# EAGLE board can-udp-bridge_0_2.pan (EAGLE 7.2.0)
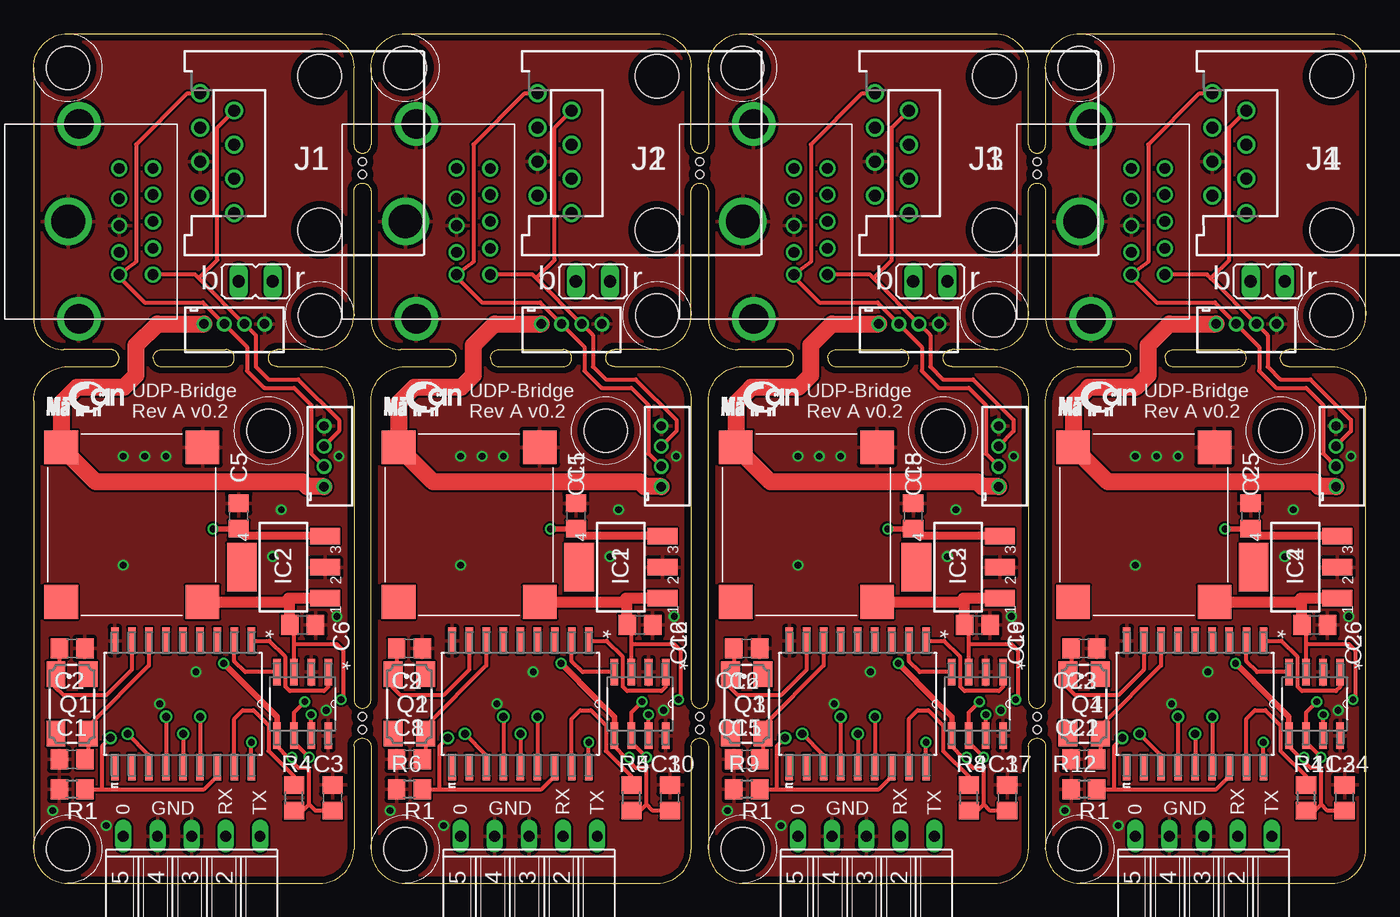
[diagram p0: board, top side]
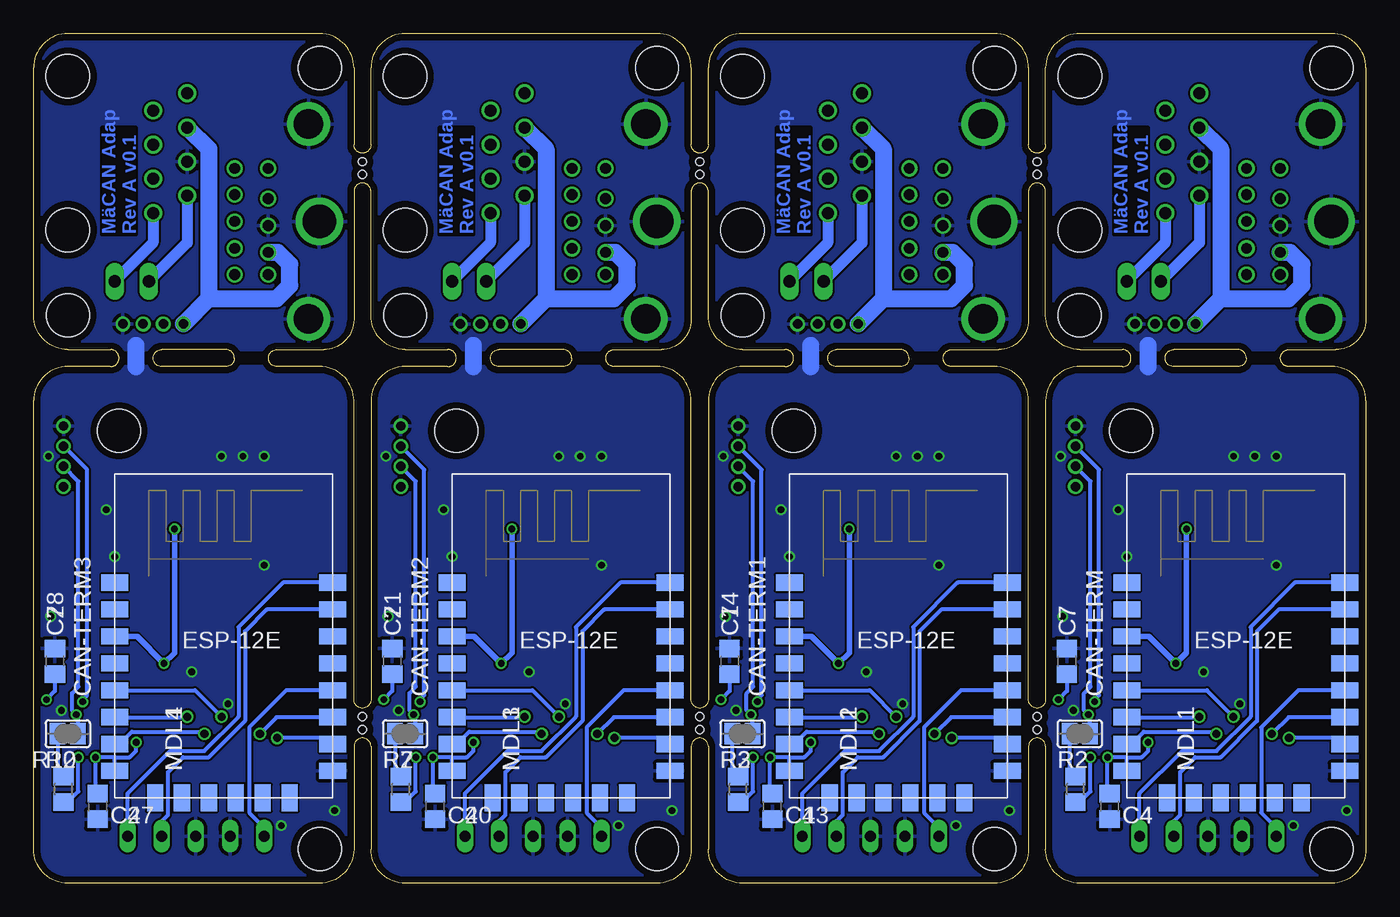
[diagram p1: board, bottom side, seen from below]

Size 99.06 x 63.18 mm. Coordinates in mm from the lower left corner, seen from the top.
Outline: 2.54,0 21.27,0 arc90 23.81,2.54 23.81,10.16 arc-90 24.45,10.79 arc-90 25.08,10.16 25.08,2.54 arc90 27.62,0 46.35,0 arc90 48.9,2.54 48.9,10.16 arc-90 49.53,10.79 arc-90 50.16,10.16 50.16,2.54 arc90 52.7,0 71.44,0 arc90 73.98,2.54 73.98,10.16 arc-90 74.61,10.79 arc-90 75.25,10.16 75.25,2.54 arc90 77.79,0 96.52,0 arc90 99.06,2.54 99.06,35.88 arc90 96.52,38.42 93.34,38.42 arc-90 92.71,39.05 arc-90 93.34,39.69 96.52,39.69 arc90 99.06,42.23 99.06,60.64 arc90 96.52,63.18 77.79,63.18 arc90 75.25,60.64 75.25,54.93 arc-90 74.61,54.29 arc-90 73.98,54.93 73.98,60.64 arc90 71.44,63.18 52.7,63.18 arc90 50.16,60.64 50.16,54.93 arc-90 49.53,54.29 arc-90 48.9,54.93 48.9,60.64 arc90 46.35,63.18 27.62,63.18 arc90 25.08,60.64 25.08,54.93 arc-90 24.45,54.29 arc-90 23.81,54.93 23.81,60.64 arc90 21.27,63.18 2.54,63.18 arc90 0,60.64 0,41.91 arc90 2.22,39.69 5.71,39.69 arc-90 6.35,39.05 arc-90 5.71,38.42 2.54,38.42 arc90 0,35.88 0,2.54 arc90 2.54,0
Outline: 23.81,42.23 23.81,51.44 arc-90 24.45,52.07 arc-90 25.08,51.44 25.08,41.91 arc90 27.3,39.69 30.8,39.69 arc-90 31.43,39.05 arc-90 30.8,38.42 27.62,38.42 arc90 25.08,35.88 25.08,13.65 arc-90 24.45,13.02 arc-90 23.81,13.65 23.81,35.88 arc90 21.27,38.42 18.1,38.42 arc-90 17.46,39.05 arc-90 18.1,39.69 21.27,39.69 arc90 23.81,42.23
Outline: 9.53,39.69 14.29,39.69 arc-90 14.92,39.05 arc-90 14.29,38.42 9.53,38.42 arc-90 8.89,39.05 arc-90 9.53,39.69
Outline: 43.18,38.42 46.35,38.42 arc-90 48.9,35.88 48.9,13.65 arc90 49.53,13.02 arc90 50.16,13.65 50.16,35.88 arc-90 52.7,38.42 55.88,38.42 arc90 56.52,39.05 arc90 55.88,39.69 52.39,39.69 arc-90 50.16,41.91 50.16,51.44 arc90 49.53,52.07 arc90 48.9,51.44 48.9,42.23 arc-90 46.35,39.69 43.18,39.69 arc90 42.55,39.05 arc90 43.18,38.42
Outline: 34.61,39.69 39.37,39.69 arc-90 40.01,39.05 arc-90 39.37,38.42 34.61,38.42 arc-90 33.97,39.05 arc-90 34.61,39.69
Outline: 68.26,38.42 71.44,38.42 arc-90 73.98,35.88 73.98,13.65 arc90 74.61,13.02 arc90 75.25,13.65 75.25,35.88 arc-90 77.79,38.42 80.96,38.42 arc90 81.6,39.05 arc90 80.96,39.69 77.47,39.69 arc-90 75.25,41.91 75.25,51.44 arc90 74.61,52.07 arc90 73.98,51.44 73.98,42.23 arc-90 71.44,39.69 68.26,39.69 arc90 67.63,39.05 arc90 68.26,38.42
Outline: 59.69,39.69 64.45,39.69 arc-90 65.09,39.05 arc-90 64.45,38.42 59.69,38.42 arc-90 59.05,39.05 arc-90 59.69,39.69
Outline: 84.77,39.69 89.53,39.69 arc-90 90.17,39.05 arc-90 89.53,38.42 84.77,38.42 arc-90 84.14,39.05 arc-90 84.77,39.69
Copper layers (1*16): Top 0.035mm / dielectric 1.6mm / Bottom 0.035mm
Design rules "Elecrow_2-layer_PCB_eagle_rule": minimum track width 6mil, minimum drill 12mil, track to track 6mil, track to pad 6mil, pad to pad 6mil, via to via 8mil, smd to smd 0mil, copper to edge 20mil, drill to drill 10mil, minimum pad ring 6mil, minimum via ring 6mil, stop-mask expansion 0mil, vias tented up to drill 100mil, thermal gap 10mil
Holes 3.2 mm at 2.54,2.54 17.46,33.66 21.27,42.23 2.54,60.64 27.62,2.54 42.55,33.66 46.35,42.23 27.62,60.64 52.7,2.54 67.63,33.66 71.44,42.23 52.7,60.64 77.79,2.54 92.71,33.66 96.52,42.23 77.79,60.64
Holes 0.6 mm at 24.45,53.66 24.45,52.7 49.53,53.66 49.53,52.7 74.61,53.66 74.61,52.7 24.45,12.38 24.45,11.43 49.53,12.38 49.53,11.43 74.61,12.38 74.61,11.43

## Footprints (pad centres in the part's own frame; a part is rotated, then mirrored left to right if it is on the bottom)
C0805 = smd 1.3 x 1.5: 1 -0.95,0; 2 0.95,0
SJ = smd 1.168 x 1.6: 1 -0.762,0; 2 0.762,0
SOT223 = smd 1.219 x 2.235: 1 -2.311,-3.099; 2 0,-3.099; 3 2.311,-3.099 | smd 3.6 x 2.2: 4 0,3.099
215877-7 = drill 0.889: 1 -4.445,6.35; 2 -3.175,8.89; 3 -1.905,6.35; 4 -0.635,8.89; 5 0.635,6.35; 6 1.905,8.89; 7 3.175,6.35; 8 4.445,8.89 | hole 3.251: -5.715,0; 5.715,0
ESP8266-ESP12E = smd 2 x 1.2: 1 0,16; 2 0,14; 3 0,12; 4 0,10; 5 0,8; 6 0,6; 7 0,4; 8 0,2; 9 16.2,2; 10 16.2,4; 11 16.2,6; 12 16.2,8; 13 16.2,10; 14 16.2,12; 15 16.2,14; 16 16.2,16 | smd 1.2 x 2: 17 3,0; 18 5,0; 19 7,0; 20 9,0; 21 11,0; 22 13,0
FE05W = drill 0.813 long: 1 -5.08,0; 2 -2.54,0; 3 0,0; 4 2.54,0; 5 5.08,0
CTS406 = smd 1.9 x 1.4: 1 -2.2,-1.2; 2 2.2,-1.2; 3 2.2,1.2; 4 -2.2,1.2
R0805 = smd 1.3 x 1.5: 1 -0.95,0; 2 0.95,0
JP1 = drill 0.914 long: 1 0,-1.27; 2 0,1.27
SOIC127P1034X264-18N = smd 1.981 x 0.559: 1 -4.699,5.08; 2 -4.699,3.81; 3 -4.699,2.54; 4 -4.699,1.27; 5 -4.699,0; 6 -4.699,-1.27; 7 -4.699,-2.54; 8 -4.699,-3.81; 9 -4.699,-5.08; 10 4.699,-5.08; 11 4.699,-3.81; 12 4.699,-2.54; 13 4.699,-1.27; 14 4.699,0; 15 4.699,1.27; 16 4.699,2.54; 17 4.699,3.81; 18 4.699,5.08
SOIC127P600X175-8N = smd 1.981 x 0.559: 1 -2.362,1.905; 2 -2.362,0.635; 3 -2.362,-0.635; 4 -2.362,-1.905; 5 2.362,-1.905; 6 2.362,-0.635; 7 2.362,0.635; 8 2.362,1.905
ROF-78EXX-0.5SMD = smd 2.5 x 2.5: 1 -5.25,5.75; 2 5.25,5.75; 3 5.25,-5.75; 4 -5.25,-5.75
MARKLIN-MD-10-PRINT = drill 0.8 pad 1.1: 1 -2.3,1.25; 2 -0.3,1.25; 3 1.7,1.25; 4 -3.95,1.25; 5 -2,-1.25; 6 0,-1.25; 7 3.95,1.25; 8 -3.95,-1.25; 9 2,-1.25; 10 3.95,-1.25 | drill 2.5 pad 2.8: GND1 0,5.05 | drill 2.2 pad 2.5: GND2 7.25,4.25; GND3 -7.25,4.25
B4B-ZR = drill 0.7 pad 1.1: 1 -2.25,0; 2 -0.75,0; 3 0.75,0; 4 2.25,0

## Placement (x,y rotation side)
C1  22p  [C0805]  2.86,9.21 180 top
C2  22p  [C0805]  2.86,17.46 0 top
C3  100n  [C0805]  22.23,6.35 90 top
C4  100n  [C0805]  19.05,5.71 90 bottom
C5  1µ  [C0805]  15.24,27.3 270 top
C6  1µ  [C0805]  20,19.21 180 top
C7  100n  [C0805]  22.23,16.51 90 bottom
C8  22p  [C0805]  27.94,9.21 180 top
C9  22p  [C0805]  27.94,17.46 0 top
C10  100n  [C0805]  47.31,6.35 90 top
C11  1µ  [C0805]  40.32,27.3 270 top
C12  1µ  [C0805]  45.09,19.21 180 top
C13  100n  [C0805]  44.13,5.71 90 bottom
C14  100n  [C0805]  47.31,16.51 90 bottom
C15  22p  [C0805]  53.02,9.21 180 top
C16  22p  [C0805]  53.02,17.46 0 top
C17  100n  [C0805]  72.39,6.35 90 top
C18  1µ  [C0805]  65.41,27.3 270 top
C19  1µ  [C0805]  70.17,19.21 180 top
C20  100n  [C0805]  69.22,5.71 90 bottom
C21  100n  [C0805]  72.39,16.51 90 bottom
C22  22p  [C0805]  78.11,9.21 180 top
C23  22p  [C0805]  78.11,17.46 0 top
C24  100n  [C0805]  97.47,6.35 90 top
C25  1µ  [C0805]  90.49,27.3 270 top
C26  1µ  [C0805]  95.25,19.21 180 top
C27  100n  [C0805]  94.3,5.71 90 bottom
C28  100n  [C0805]  97.47,16.51 90 bottom
CAN-TERM  [SJ]  21.27,11.11 180 bottom
CAN-TERM1  [SJ]  46.35,11.11 180 bottom
CAN-TERM2  [SJ]  71.44,11.11 180 bottom
CAN-TERM3  [SJ]  96.52,11.11 180 bottom
IC1  MCP1703DB  [SOT223]  43.66,23.5 90 top
IC2  MCP1703DB  [SOT223]  18.57,23.5 90 top
IC3  MCP1703DB  [SOT223]  68.74,23.5 90 top
IC4  MCP1703DB  [SOT223]  93.82,23.5 90 top
J1  [215877-7]  21.27,54.29 90 top
J2  [215877-7]  46.35,54.29 90 top
J3  [215877-7]  71.44,54.29 90 top
J4  [215877-7]  96.52,54.29 90 top
MDL1  [ESP8266-ESP12E]  17.78,6.35 0 bottom
MDL2  [ESP8266-ESP12E]  42.86,6.35 0 bottom
MDL3  [ESP8266-ESP12E]  67.94,6.35 0 bottom
MDL4  [ESP8266-ESP12E]  93.03,6.35 0 bottom
PROG  [FE05W]  11.75,3.49 180 top
PROG1  [FE05W]  36.83,3.49 180 top
PROG2  [FE05W]  61.91,3.49 180 top
PROG3  [FE05W]  87,3.49 180 top
Q1  16M  [CTS406]  2.86,13.34 270 top
Q2  16M  [CTS406]  27.94,13.34 270 top
Q3  16M  [CTS406]  53.02,13.34 270 top
Q4  16M  [CTS406]  78.11,13.34 270 top
R1  12k  [R0805]  2.86,6.99 180 top
R2  120R  [R0805]  21.59,6.99 90 bottom
R3  120R  [R0805]  46.67,6.99 90 bottom
R4  12k  [R0805]  19.37,6.35 90 top
R5  12k  [R0805]  44.45,6.35 90 top
R6  12k  [R0805]  27.94,6.99 180 top
R7  120R  [R0805]  71.75,6.99 90 bottom
R8  12k  [R0805]  69.53,6.35 90 top
R9  12k  [R0805]  53.02,6.99 180 top
R10  120R  [R0805]  96.84,6.99 90 bottom
R11  12k  [R0805]  94.61,6.35 90 top
R12  12k  [R0805]  78.11,6.99 180 top
TRACK  [JP1]  16.51,44.77 90 top
TRACK1  [JP1]  41.59,44.77 90 top
TRACK2  [JP1]  66.67,44.77 90 top
TRACK3  [JP1]  91.76,44.77 90 top
U$1  MCP2515-I/SO  [SOIC127P1034X264-18N]  11.11,13.34 270 top
U$2  MCP2562  [SOIC127P600X175-8N]  20,13.34 270 top
U$3  ROF-78E5.0-0.5SMD  [ROF-78EXX-0.5SMD]  7.3,26.67 0 top
U$4  MARKLIN-MD-10  [MARKLIN-MD-10-PRINT]  7.62,49.21 90 top
U$5  MCP2515-I/SO  [SOIC127P1034X264-18N]  36.2,13.34 270 top
U$6  MCP2562  [SOIC127P600X175-8N]  45.09,13.34 270 top
U$7  ROF-78E5.0-0.5SMD  [ROF-78EXX-0.5SMD]  32.38,26.67 0 top
U$8  MARKLIN-MD-10  [MARKLIN-MD-10-PRINT]  32.7,49.21 90 top
U$9  MCP2515-I/SO  [SOIC127P1034X264-18N]  61.28,13.34 270 top
U$10  MCP2562  [SOIC127P600X175-8N]  70.17,13.34 270 top
U$11  ROF-78E5.0-0.5SMD  [ROF-78EXX-0.5SMD]  57.47,26.67 0 top
U$12  MARKLIN-MD-10  [MARKLIN-MD-10-PRINT]  57.78,49.21 90 top
U$13  MCP2515-I/SO  [SOIC127P1034X264-18N]  86.36,13.34 270 top
U$14  MCP2562  [SOIC127P600X175-8N]  95.25,13.34 270 top
U$15  ROF-78E5.0-0.5SMD  [ROF-78EXX-0.5SMD]  82.55,26.67 0 top
U$16  MARKLIN-MD-10  [MARKLIN-MD-10-PRINT]  82.87,49.21 90 top
X1  B4B-ZR  [B4B-ZR]  21.59,31.75 90 top
X2  B4B-ZR  [B4B-ZR]  46.67,31.75 90 top
X3  B4B-ZR  [B4B-ZR]  14.92,41.59 0 top
X4  B4B-ZR  [B4B-ZR]  40.01,41.59 0 top
X5  B4B-ZR  [B4B-ZR]  71.75,31.75 90 top
X6  B4B-ZR  [B4B-ZR]  65.09,41.59 0 top
X7  B4B-ZR  [B4B-ZR]  96.84,31.75 90 top
X8  B4B-ZR  [B4B-ZR]  90.17,41.59 0 top

## Library data of the parts
C1-C28 R1-R12 = rcl
CAN-TERM CAN-TERM1-CAN-TERM3 TRACK TRACK1-TRACK3 = jumper
IC1-IC4 = linear
J1-J4 = con-amp
MDL1-MDL4 = ESP8266-ESP12E
PROG PROG1-PROG3 = con-lsta; OC_FARNELL: unknown; OC_NEWARK: unknown
Q1-Q4 = crystal; OC_FARNELL: unknown; OC_NEWARK: unknown
U$1 U$5 U$9 U$13 = Microchip_By_element14_Batch_1; MPN: MCP2515-I/SO; OC_FARNELL: 1292239; OC_NEWARK: 29H7136; PACKAGE: SOIC-18; SUPPLIER: Microchip
U$2 U$6 U$10 U$14 = Microchip_By_element14_Batch_1; DESCRIPTION: High-Speed CAN Transceiver; MPN: MCP2551-E/SN; OC_FARNELL: 1467746; OC_NEWARK: 92C4186; PACKAGE: SOIC-8; SUPPLIER: Microchip
U$3 U$7 U$11 U$15 = ROF-78XX
U$4 U$8 U$12 U$16 = Marklin-Mini-DIN
X1-X8 = con-jst; MF: FARNELL; MPN: B4B-ZR(LF)(SN); OC_FARNELL: 1830916; OC_NEWARK: 37K9960

## Nets
+3V1: C10.1 C11.2 C13.2 IC1.3 MDL2.3 MDL2.8 R5.1 U$5.18 U$6.5
+3V2: C17.1 C18.2 C20.2 IC3.3 MDL3.3 MDL3.8 R8.1 U$9.18 U$10.5
+3V3: C3.1 C4.2 C5.2 IC2.3 MDL1.3 MDL1.8 R4.1 U$1.18 U$2.5
+3V4: C24.1 C25.2 C27.2 IC4.3 MDL4.3 MDL4.8 R11.1 U$13.18 U$14.5
+5V: C6.2 C7.1 IC2.1 U$2.3 U$3.3
+5V1: C12.2 C14.1 IC1.1 U$6.3 U$7.3
+5V2: C19.2 C21.1 IC3.1 U$10.3 U$11.3
+5V3: C26.2 C28.1 IC4.1 U$14.3 U$15.3
+18V: J1.6 U$3.1 U$4.1 X1.1 X3.1
+18V1: J2.6 U$7.1 U$8.1 X2.1 X4.1
+18V2: J3.6 U$11.1 U$12.1 X5.1 X6.1
+18V3: J4.6 U$15.1 U$16.1 X7.1 X8.1
CAN_H: CAN-TERM.1 J1.8 U$2.7 U$4.4 X1.2 X3.2
CAN_H1: CAN-TERM1.1 J2.8 U$6.7 U$8.4 X2.2 X4.2
CAN_H2: CAN-TERM2.1 J3.8 U$10.7 U$12.4 X5.2 X6.2
CAN_H3: CAN-TERM3.1 J4.8 U$14.7 U$16.4 X7.2 X8.2
CAN_L: J1.7 R2.1 U$2.6 U$4.8 X1.3 X3.3
CAN_L1: J2.7 R3.1 U$6.6 U$8.8 X2.3 X4.3
CAN_L2: J3.7 R7.1 U$10.6 U$12.8 X5.3 X6.3
CAN_L3: J4.7 R10.1 U$14.6 U$16.8 X7.3 X8.3
CS: MDL1.10 R1.1 U$1.16
CS1: MDL2.10 R6.1 U$5.16
CS2: MDL3.10 R9.1 U$9.16
CS3: MDL4.10 R12.1 U$13.16
GND: C1.2 C2.2 C3.2 C4.1 C5.1 C6.1 C7.2 IC2.2 J1.4 MDL1.9 PROG.3 PROG.4 R1.2 U$1.9 U$2.2 U$2.8 U$3.2 U$4.2 U$4.GND1 U$4.GND2 U$4.GND3 X1.4 X3.4
GND1: C8.2 C9.2 C10.2 C11.1 C12.1 C13.1 C14.2 IC1.2 J2.4 MDL2.9 PROG1.3 PROG1.4 R6.2 U$5.9 U$6.2 U$6.8 U$7.2 U$8.2 U$8.GND1 U$8.GND2 U$8.GND3 X2.4 X4.4
GND2: C15.2 C16.2 C17.2 C18.1 C19.1 C20.1 C21.2 IC3.2 J3.4 MDL3.9 PROG2.3 PROG2.4 R9.2 U$9.9 U$10.2 U$10.8 U$11.2 U$12.2 U$12.GND1 U$12.GND2 U$12.GND3 X5.4 X6.4
GND3: C22.2 C23.2 C24.2 C25.1 C26.1 C27.1 C28.2 IC4.2 J4.4 MDL4.9 PROG3.3 PROG3.4 R12.2 U$13.9 U$14.2 U$14.8 U$15.2 U$16.2 U$16.GND1 U$16.GND2 U$16.GND3 X7.4 X8.4
INT: MDL1.11 U$1.12
INT1: MDL2.11 U$5.12
INT2: MDL3.11 U$9.12
INT3: MDL4.11 U$13.12
N$1: U$1.1 U$2.1
N$2: U$1.2 U$2.4
N$3: U$5.1 U$6.1
N$4: MDL1.12 PROG.5
N$5: U$5.2 U$6.4
N$6: C8.1 Q2.3 U$5.7
N$7: C9.1 Q2.1 U$5.8
N$8: CAN-TERM1.2 R3.2
N$9: MDL2.16 PROG1.1
N$10: MDL2.15 PROG1.2
N$11: J2.2 TRACK1.2
N$12: J2.1 TRACK1.1
N$13: C1.1 Q1.3 U$1.7
N$14: C2.1 Q1.1 U$1.8
N$15: CAN-TERM.2 R2.2
N$16: MDL1.16 PROG.1
N$17: MDL1.15 PROG.2
N$18: J1.2 TRACK.2
N$19: J1.1 TRACK.1
N$20: R4.2 U$1.17
N$21: R5.2 U$5.17
N$22: MDL2.12 PROG1.5
N$23: U$9.1 U$10.1
N$24: U$9.2 U$10.4
N$25: C15.1 Q3.3 U$9.7
N$26: C16.1 Q3.1 U$9.8
N$27: CAN-TERM2.2 R7.2
N$28: MDL3.16 PROG2.1
N$29: MDL3.15 PROG2.2
N$30: J3.2 TRACK2.2
N$31: J3.1 TRACK2.1
N$32: R8.2 U$9.17
N$33: MDL3.12 PROG2.5
N$34: U$13.1 U$14.1
N$35: U$13.2 U$14.4
N$36: C22.1 Q4.3 U$13.7
N$37: C23.1 Q4.1 U$13.8
N$38: CAN-TERM3.2 R10.2
N$39: MDL4.16 PROG3.1
N$40: MDL4.15 PROG3.2
N$41: J4.2 TRACK3.2
N$42: J4.1 TRACK3.1
N$43: R11.2 U$13.17
N$44: MDL4.12 PROG3.5
SCK: MDL1.5 U$1.13
SCK1: MDL2.5 U$5.13
SCK2: MDL3.5 U$9.13
SCK3: MDL4.5 U$13.13
SI: MDL1.7 U$1.14
SI1: MDL2.7 U$5.14
SI2: MDL3.7 U$9.14
SI3: MDL4.7 U$13.14
SO: MDL1.6 U$1.15
SO1: MDL2.6 U$5.15
SO2: MDL3.6 U$9.15
SO3: MDL4.6 U$13.15

## Tracks (layer width: path | path; a pad name or v marks a point on that pad's centre or on a via)
+3V1  (via drill 0.5, 0.5 pad 0.25)
  Top 0.305: C11.2 | 41.27,14.29 41.91,13.65 | U$5.18 v41.27,10.48 | U$6.5 43.18,10.16 43.97,9.37 v44.29,9.37 44.29,9.05 44.77,8.57 45.4,8.57 45.56,8.41 45.56,5.87 | 44.77,5.4 R5.1 45.09,5.4 45.56,5.87 | C10.1 46.03,5.4 45.56,5.87
  Top 0.406: U$6.5 43.18,12.38 41.91,13.65 v39.21,16.35 | C11.2 v38.42,26.36 v38.42,26.35
  Top 0.61: IC1.3 40.87,25.81 C11.2
  Bottom 0.305: 42.23,8.26 42.77,8.26 MDL2.8 42.86,9.37 | 42.86,9.37 41.75,9.37 41.27,9.84 v41.27,10.48 | 42.86,9.37 v44.29,9.37 44.29,7.14 44.13,6.99 C13.2
  Bottom 0.406: v38.42,26.35 38.42,17.14 v39.21,16.35 41.21,18.35 MDL2.3
+3V2  (via drill 0.5, 0.5 pad 0.25)
  Top 0.305: C18.2 | 66.36,14.29 66.99,13.65 | U$9.18 v66.36,10.48 | U$10.5 68.26,10.16 69.06,9.37 v69.37,9.37 69.37,9.05 69.85,8.57 70.48,8.57 70.64,8.41 70.64,5.87 | 69.86,5.4 R8.1 70.17,5.4 70.64,5.87 | C17.1 71.12,5.4 70.64,5.87
  Top 0.406: U$10.5 68.26,12.38 66.99,13.65 v64.29,16.35 | C18.2 v63.5,26.36 v63.5,26.35
  Top 0.61: IC3.3 65.95,25.81 C18.2
  Bottom 0.305: 67.31,8.26 67.85,8.26 MDL3.8 67.94,9.37 | 67.94,9.37 66.83,9.37 66.36,9.84 v66.36,10.48 | 67.94,9.37 v69.37,9.37 69.37,7.14 69.22,6.99 C20.2
  Bottom 0.406: v63.5,26.35 63.5,17.14 v64.29,16.35 66.29,18.35 MDL3.3
+3V3  (via drill 0.5, 0.5 pad 0.25)
  Top 0.305: C5.2 | 16.19,14.29 16.83,13.65 | U$1.18 v16.19,10.48 | U$2.5 18.1,10.16 18.89,9.37 v19.21,9.37 19.21,9.05 19.68,8.57 20.32,8.57 20.48,8.41 20.48,5.87 | 19.69,5.4 R4.1 20,5.4 20.48,5.87 | C3.1 20.95,5.4 20.48,5.87
  Top 0.406: U$2.5 18.1,12.38 16.83,13.65 v14.13,16.35 | C5.2 v13.34,26.36 v13.34,26.35
  Top 0.61: IC2.3 15.79,25.81 C5.2
  Bottom 0.305: 17.14,8.26 17.68,8.26 MDL1.8 17.78,9.37 | 17.78,9.37 16.67,9.37 16.19,9.84 v16.19,10.48 | 17.78,9.37 v19.21,9.37 19.21,7.14 19.05,6.99 C4.2
  Bottom 0.406: v13.34,26.35 13.34,17.14 v14.13,16.35 16.13,18.35 MDL1.3
+3V4  (via drill 0.5, 0.5 pad 0.25)
  Top 0.305: C25.2 | 91.44,14.29 92.08,13.65 | U$13.18 v91.44,10.48 | U$14.5 93.34,10.16 94.14,9.37 v94.46,9.37 94.46,9.05 94.93,8.57 95.57,8.57 95.73,8.41 95.73,5.87 | 94.94,5.4 R11.1 95.25,5.4 95.73,5.87 | C24.1 96.2,5.4 95.73,5.87
  Top 0.406: U$14.5 93.34,12.38 92.08,13.65 v89.38,16.35 | C25.2 v88.58,26.36 v88.58,26.35
  Top 0.61: IC4.3 91.04,25.81 C25.2
  Bottom 0.305: 92.39,8.26 92.93,8.26 MDL4.8 93.03,9.37 | 93.03,9.37 91.92,9.37 91.44,9.84 v91.44,10.48 | 93.03,9.37 v94.46,9.37 94.46,7.14 94.3,6.99 C27.2
  Bottom 0.406: v88.58,26.35 88.58,17.14 v89.38,16.35 91.38,18.35 MDL4.3
+5V  (via drill 0.5)
  Top 0.305: 19.37,17.78 19.37,19.37 | U$2.3 19.37,17.78 | 19.37,17.78 22.54,17.78 23.02,17.3 23.02,13.81 v22.86,13.65
  Top 0.406: 19.37,19.37 C6.2
  Top 0.813: IC2.1 19.05,21.18 | C6.2 19.05,21.18 | U$3.3 18.7,20.92 18.96,21.18 19.05,21.18
  Bottom 0.305: C7.1 22.23,14.29 v22.86,13.65
+5V1  (via drill 0.5)
  Top 0.305: 44.45,17.78 44.45,19.37 | U$6.3 44.45,17.78 | 44.45,17.78 47.62,17.78 48.1,17.3 48.1,13.81 v47.94,13.65
  Top 0.406: 44.45,19.37 C12.2
  Top 0.813: IC1.1 44.13,21.18 | C12.2 44.13,21.18 | U$7.3 43.78,20.92 44.04,21.18 44.13,21.18
  Bottom 0.305: C14.1 47.31,14.29 v47.94,13.65
+5V2  (via drill 0.5)
  Top 0.305: 69.53,17.78 69.53,19.37 | U$10.3 69.53,17.78 | 69.53,17.78 72.71,17.78 73.18,17.3 73.18,13.81 v73.03,13.65
  Top 0.406: 69.53,19.37 C19.2
  Top 0.813: IC3.1 69.22,21.18 | C19.2 69.22,21.18 | U$11.3 68.86,20.92 69.13,21.18 69.22,21.18
  Bottom 0.305: C21.1 72.39,14.29 v73.03,13.65
+5V3  (via drill 0.5)
  Top 0.305: 94.61,17.78 94.61,19.37 | U$14.3 94.61,17.78 | 94.61,17.78 97.79,17.78 98.27,17.3 98.27,13.81 v98.11,13.65
  Top 0.406: 94.61,19.37 C26.2
  Top 0.813: IC4.1 94.3,21.18 | C26.2 94.3,21.18 | U$15.3 93.94,20.92 94.21,21.18 94.3,21.18
  Bottom 0.305: C28.1 97.47,14.29 v98.11,13.65
+18V
  Top 1.27: X3.1 9.21,41.59 7.62,40.01 7.62,37.78 6.7,36.87 3.21,36.87 2.05,35.71 U$3.1 4.63,29.84 20,29.84 20.35,29.5 X1.1
  Bottom 1.27: J1.6 10.79,54.61 10.79,43.47 | 10.79,43.47 5.74,43.47 4.76,44.45 4.76,46.04 5.64,46.91 U$4.1 | 10.79,43.47 X3.1
+18V1
  Top 1.27: X4.1 34.29,41.59 32.7,40.01 32.7,37.78 31.79,36.87 28.29,36.87 27.14,35.71 U$7.1 29.71,29.84 45.09,29.84 45.43,29.5 X2.1
  Bottom 1.27: J2.6 35.88,54.61 35.88,43.47 | 35.88,43.47 30.82,43.47 29.84,44.45 29.84,46.04 30.72,46.91 U$8.1 | 35.88,43.47 X4.1
+18V2
  Top 1.27: X6.1 59.37,41.59 57.78,40.01 57.78,37.78 56.87,36.87 53.38,36.87 52.22,35.71 U$11.1 54.79,29.84 70.17,29.84 70.51,29.5 X5.1
  Bottom 1.27: J3.6 60.96,54.61 60.96,43.47 | 60.96,43.47 55.91,43.47 54.93,44.45 54.93,46.04 55.8,46.91 U$12.1 | 60.96,43.47 X6.1
+18V3
  Top 1.27: X8.1 84.45,41.59 82.87,40.01 82.87,37.78 81.95,36.87 78.46,36.87 77.3,35.71 U$15.1 79.88,29.84 95.25,29.84 95.59,29.5 X7.1
  Bottom 1.27: J4.6 86.04,54.61 86.04,43.47 | 86.04,43.47 80.99,43.47 80.01,44.45 80.01,46.04 80.89,46.91 U$16.1 | 86.04,43.47 X8.1
CAN_H  (via drill 0.5)
  Top 0.305: U$2.7 v20.64,12.54 | X1.2 20.64,31.95 20.64,35.56 19.37,36.83 17.14,36.83 15.88,38.1 15.88,39.89 X3.2 12.59,43.18 8.26,43.18 6.37,45.06 U$4.4 7.62,46.2 7.62,54.93 11.43,58.74 J1.8
  Bottom 0.305: CAN-TERM.1 20.51,12.41 v20.64,12.54 20.95,12.86 20.95,14.13 20.48,14.61 20.48,29.89 X1.2
CAN_H1  (via drill 0.5)
  Top 0.305: U$6.7 v45.72,12.54 | X2.2 45.72,31.95 45.72,35.56 44.45,36.83 42.23,36.83 40.96,38.1 40.96,39.89 X4.2 37.67,43.18 33.34,43.18 31.45,45.06 U$8.4 32.7,46.2 32.7,54.93 36.51,58.74 J2.8
  Bottom 0.305: CAN-TERM1.1 45.59,12.41 v45.72,12.54 46.04,12.86 46.04,14.13 45.56,14.61 45.56,29.89 X2.2
CAN_H2  (via drill 0.5)
  Top 0.305: U$10.7 v70.8,12.54 | X5.2 70.8,31.95 70.8,35.56 69.53,36.83 67.31,36.83 66.04,38.1 66.04,39.89 X6.2 62.75,43.18 58.42,43.18 56.53,45.06 U$12.4 57.78,46.2 57.78,54.93 61.59,58.74 J3.8
  Bottom 0.305: CAN-TERM2.1 70.67,12.41 v70.8,12.54 71.12,12.86 71.12,14.13 70.64,14.61 70.64,29.89 X5.2
CAN_H3  (via drill 0.5)
  Top 0.305: U$14.7 v95.89,12.54 | X7.2 95.89,31.95 95.89,35.56 94.61,36.83 92.39,36.83 91.12,38.1 91.12,39.89 X8.2 87.83,43.18 83.5,43.18 81.62,45.06 U$16.4 82.87,46.2 82.87,54.93 86.68,58.74 J4.8
  Bottom 0.305: CAN-TERM3.1 95.76,12.41 v95.89,12.54 96.2,12.86 96.2,14.13 95.73,14.61 95.73,29.89 X7.2
CAN_L  (via drill 0.5, 0.5 pad 0.25)
  Top 0.305: v20.16,13.49 19.37,12.7 U$2.6 19.37,10.48 v20.48,9.37 | 12.28,44.98 12,45.26 U$4.8 | J1.7 13.65,56.2 13.65,46.35 12.28,44.98 | X1.3 22.7,33.61 22.7,34.45 19.68,37.47 17.46,37.47 16.51,38.42 16.51,40.76 X3.3 12.28,44.98
  Bottom 0.305: X1.3 19.84,30.75 19.84,13.97 20.16,13.65 v20.16,13.49 | R2.1 21.59,5.72 20.48,6.83 v20.48,9.37
CAN_L1  (via drill 0.5, 0.5 pad 0.25)
  Top 0.305: v45.24,13.49 44.45,12.7 U$6.6 44.45,10.48 v45.56,9.37 | 37.36,44.98 37.09,45.26 U$8.8 | J2.7 38.73,56.2 38.73,46.35 37.36,44.98 | X2.3 47.78,33.61 47.78,34.45 44.77,37.47 42.55,37.47 41.59,38.42 41.59,40.76 X4.3 37.36,44.98
  Bottom 0.305: X2.3 44.93,30.75 44.93,13.97 45.24,13.65 v45.24,13.49 | R3.1 46.67,5.72 45.56,6.83 v45.56,9.37
CAN_L2  (via drill 0.5, 0.5 pad 0.25)
  Top 0.305: v70.33,13.49 69.53,12.7 U$10.6 69.53,10.48 v70.64,9.37 | 62.45,44.98 62.17,45.26 U$12.8 | J3.7 63.82,56.2 63.82,46.35 62.45,44.98 | X5.3 72.87,33.61 72.87,34.45 69.85,37.47 67.63,37.47 66.67,38.42 66.67,40.76 X6.3 62.45,44.98
  Bottom 0.305: X5.3 70.01,30.75 70.01,13.97 70.33,13.65 v70.33,13.49 | R7.1 71.75,5.72 70.64,6.83 v70.64,9.37
CAN_L3  (via drill 0.5, 0.5 pad 0.25)
  Top 0.305: v95.41,13.49 94.61,12.7 U$14.6 94.61,10.48 v95.73,9.37 | 87.53,44.98 87.25,45.26 U$16.8 | J4.7 88.9,56.2 88.9,46.35 87.53,44.98 | X7.3 97.95,33.61 97.95,34.45 94.93,37.47 92.71,37.47 91.76,38.42 91.76,40.76 X8.3 87.53,44.98
  Bottom 0.305: X7.3 95.09,30.75 95.09,13.97 95.41,13.65 v95.41,13.49 | R10.1 96.83,5.72 95.73,6.83 v95.73,9.37
CS  (via drill 0.6)
  Top 0.305: v5.71,10.79 5.08,10.16 5.08,6.99 | 4.13,6.99 R1.1 5.08,6.99 | 5.08,6.99 12.7,6.99 13.65,7.94 U$1.16
  Bottom 0.305: MDL1.10 2.02,10.79 v5.71,10.79
CS1  (via drill 0.6)
  Top 0.305: v30.8,10.79 30.16,10.16 30.16,6.99 | 29.21,6.99 R6.1 30.16,6.99 | 30.16,6.99 37.78,6.99 38.73,7.94 U$5.16
  Bottom 0.305: MDL2.10 27.11,10.79 v30.8,10.79
CS2  (via drill 0.6)
  Top 0.305: v55.88,10.79 55.24,10.16 55.24,6.99 | 54.29,6.99 R9.1 55.24,6.99 | 55.24,6.99 62.87,6.99 63.82,7.94 U$9.16
  Bottom 0.305: MDL3.10 52.19,10.79 v55.88,10.79
CS3  (via drill 0.6)
  Top 0.305: v80.96,10.79 80.33,10.16 80.33,6.99 | 79.38,6.99 R12.1 80.33,6.99 | 80.33,6.99 87.95,6.99 88.9,7.94 U$13.16
  Bottom 0.305: MDL4.10 77.27,10.79 v80.96,10.79
GND  (via drill 0.5, 0.5 pad 0.25)
  Bottom 1.27: 16.19,38.42 16.19,40.01
  other vias: 22.54,19.84 22.7,31.75 6.67,23.65 12.06,15.72 8.26,31.75 9.84,31.75 6.67,31.75 9.37,13.34 5.4,4.29 1.43,5.4 21.75,12.86 18.41,27.78 17.78,24.29
  pour Bottom: 0,35.88 arc-90 2.54,38.42 21.27,38.42 arc-90 23.81,35.88 23.81,2.54 arc-90 21.27,0 2.54,0 arc-90 0,2.54
  pour Top: 0,35.88 arc-90 2.54,38.42 21.27,38.42 arc-90 23.81,35.88 23.81,2.54 arc-90 21.27,0 2.54,0 arc-90 0,2.54
  pour Bottom: 0,60.64 arc-90 2.54,63.18 21.27,63.18 arc-90 23.81,60.64 23.81,42.23 arc-90 21.27,39.69 2.22,39.69 arc-90 0,41.91
  pour Top: 0,60.64 arc-90 2.54,63.18 21.27,63.18 arc-90 23.81,60.64 23.81,42.23 arc-90 21.27,39.69 2.22,39.69 arc-90 0,41.91
GND1  (via drill 0.5, 0.5 pad 0.25)
  Bottom 1.27: 41.27,38.42 41.27,40.01
  other vias: 47.62,19.84 47.78,31.75 31.75,23.65 37.15,15.72 33.34,31.75 34.92,31.75 31.75,31.75 34.45,13.34 30.48,4.29 26.51,5.4 46.83,12.86 43.5,27.78 42.86,24.29
  pour Bottom: 25.08,35.88 arc-90 27.62,38.42 46.35,38.42 arc-90 48.9,35.88 48.9,2.54 arc-90 46.35,0 27.62,0 arc-90 25.08,2.54
  pour Top: 25.08,35.88 arc-90 27.62,38.42 46.35,38.42 arc-90 48.9,35.88 48.9,2.54 arc-90 46.35,0 27.62,0 arc-90 25.08,2.54
  pour Bottom: 25.08,60.64 arc-90 27.62,63.18 46.35,63.18 arc-90 48.9,60.64 48.9,42.23 arc-90 46.35,39.69 27.3,39.69 arc-90 25.08,41.91
  pour Top: 25.08,60.64 arc-90 27.62,63.18 46.35,63.18 arc-90 48.9,60.64 48.9,42.23 arc-90 46.35,39.69 27.3,39.69 arc-90 25.08,41.91
GND2  (via drill 0.5, 0.5 pad 0.25)
  Bottom 1.27: 66.36,38.42 66.36,40.01
  other vias: 72.71,19.84 72.87,31.75 56.83,23.65 62.23,15.72 58.42,31.75 60.01,31.75 56.83,31.75 59.53,13.34 55.56,4.29 51.59,5.4 71.91,12.86 68.58,27.78 67.94,24.29
  pour Bottom: 50.16,35.88 arc-90 52.7,38.42 71.44,38.42 arc-90 73.98,35.88 73.98,2.54 arc-90 71.44,0 52.7,0 arc-90 50.16,2.54
  pour Top: 50.16,35.88 arc-90 52.7,38.42 71.44,38.42 arc-90 73.98,35.88 73.98,2.54 arc-90 71.44,0 52.7,0 arc-90 50.16,2.54
  pour Bottom: 50.16,60.64 arc-90 52.7,63.18 71.44,63.18 arc-90 73.98,60.64 73.98,42.23 arc-90 71.44,39.69 52.39,39.69 arc-90 50.16,41.91
  pour Top: 50.16,60.64 arc-90 52.7,63.18 71.44,63.18 arc-90 73.98,60.64 73.98,42.23 arc-90 71.44,39.69 52.39,39.69 arc-90 50.16,41.91
GND3  (via drill 0.5, 0.5 pad 0.25)
  Bottom 1.27: 91.44,38.42 91.44,40.01
  other vias: 97.79,19.84 97.95,31.75 81.92,23.65 87.31,15.72 83.5,31.75 85.09,31.75 81.92,31.75 84.61,13.34 80.64,4.29 76.68,5.4 97,12.86 93.66,27.78 93.03,24.29
  pour Bottom: 75.25,35.88 arc-90 77.79,38.42 96.52,38.42 arc-90 99.06,35.88 99.06,2.54 arc-90 96.52,0 77.79,0 arc-90 75.25,2.54
  pour Top: 75.25,35.88 arc-90 77.79,38.42 96.52,38.42 arc-90 99.06,35.88 99.06,2.54 arc-90 96.52,0 77.79,0 arc-90 75.25,2.54
  pour Bottom: 75.25,60.64 arc-90 77.79,63.18 96.52,63.18 arc-90 99.06,60.64 99.06,42.23 arc-90 96.52,39.69 77.47,39.69 arc-90 75.25,41.91
  pour Top: 75.25,60.64 arc-90 77.79,63.18 96.52,63.18 arc-90 99.06,60.64 99.06,42.23 arc-90 96.52,39.69 77.47,39.69 arc-90 75.25,41.91
INT  (via drill 0.6)
  Top 0.305: U$1.12 8.57,9.53 v6.99,11.11
  Bottom 0.305: MDL1.11 5.75,12.35 v6.99,11.11
INT1  (via drill 0.6)
  Top 0.305: U$5.12 33.66,9.53 v32.07,11.11
  Bottom 0.305: MDL2.11 30.83,12.35 v32.07,11.11
INT2  (via drill 0.6)
  Top 0.305: U$9.12 58.74,9.53 v57.15,11.11
  Bottom 0.305: MDL3.11 55.91,12.35 v57.15,11.11
INT3  (via drill 0.6)
  Top 0.305: U$13.12 83.82,9.53 v82.23,11.11
  Bottom 0.305: MDL4.11 81,12.35 v82.23,11.11
N$1
  Top 0.305: U$2.1 21.91,14.61 21.59,14.29 19.05,14.29 18.73,14.61 18.73,16.83 17.53,18.03 U$1.1
N$2
  Top 0.305: U$2.4 15.73,15.7 14.92,16.51 U$1.2
N$3
  Top 0.305: U$6.1 46.99,14.61 46.67,14.29 44.13,14.29 43.81,14.61 43.81,16.83 42.61,18.03 U$5.1
N$4
  Bottom 0.305: MDL1.12 5.02,14.35 7.78,11.59 7.78,5.24 6.67,4.13 PROG.5
N$5
  Top 0.305: U$6.4 40.82,15.7 40.01,16.51 U$5.2
N$6
  Top 0.305: C8.1 29.14,9.46 Q2.3 29.21,11.21 29.21,11.75 33.66,16.19 U$5.7
N$7
  Top 0.305: C9.1 26.99,15.79 Q2.1 26.67,15.46 26.67,14.61 27.3,13.97 30.48,13.97 32.38,15.88 U$5.8
N$8
  Bottom 0.305: CAN-TERM1.2 47.12,8.13 R3.2
N$9
  Bottom 0.305: PROG1.1 41.91,6.67 38.73,9.84 36.2,9.84 33.66,12.38 33.66,19.05 30.36,22.35 MDL2.16
N$10
  Bottom 0.305: MDL2.15 31.56,20.35 33.18,18.73 33.18,12.06 35.88,9.37 37.78,9.37 38.89,8.26 38.89,5.08 39.37,4.6 PROG1.2
N$11
  Bottom 0.813: J2.2 37.47,47.62 TRACK1.2
N$12
  Bottom 0.813: J2.1 40.01,47.62 TRACK1.1
N$13
  Top 0.305: C1.1 4.06,9.46 Q1.3 4.13,11.21 4.13,11.75 8.57,16.19 U$1.7
N$14
  Top 0.305: C2.1 1.91,15.79 Q1.1 1.59,15.46 1.59,14.61 2.22,13.97 5.4,13.97 7.3,15.88 U$1.8
N$15
  Bottom 0.305: CAN-TERM.2 22.04,8.13 R2.2
N$16
  Bottom 0.305: PROG.1 16.83,6.67 13.65,9.84 11.11,9.84 8.57,12.38 8.57,19.05 5.27,22.35 MDL1.16
N$17
  Bottom 0.305: MDL1.15 6.48,20.35 8.1,18.73 8.1,12.06 10.79,9.37 12.7,9.37 13.81,8.26 13.81,5.08 14.29,4.6 PROG.2
N$18
  Bottom 0.813: J1.2 12.38,47.62 TRACK.2
N$19
  Bottom 0.813: J1.1 14.92,47.62 TRACK.1
N$20
  Top 0.305: U$1.17 14.92,12.22 15.56,12.86 16.35,12.86 17.46,11.75 17.46,9.84 19.37,7.94 R4.2
N$21
  Top 0.305: U$5.17 40.01,12.22 40.64,12.86 41.43,12.86 42.55,11.75 42.55,9.84 44.45,7.94 R5.2
N$22
  Bottom 0.305: MDL2.12 30.1,14.35 32.86,11.59 32.86,5.24 31.75,4.13 PROG1.5
N$23
  Top 0.305: U$10.1 72.07,14.61 71.75,14.29 69.22,14.29 68.9,14.61 68.9,16.83 67.69,18.03 U$9.1
N$24
  Top 0.305: U$10.4 65.9,15.7 65.09,16.51 U$9.2
N$25
  Top 0.305: C15.1 54.22,9.46 Q3.3 54.29,11.21 54.29,11.75 58.74,16.19 U$9.7
N$26
  Top 0.305: C16.1 52.07,15.79 Q3.1 51.75,15.46 51.75,14.61 52.39,13.97 55.56,13.97 57.47,15.88 U$9.8
N$27
  Bottom 0.305: CAN-TERM2.2 72.2,8.13 R7.2
N$28
  Bottom 0.305: PROG2.1 66.99,6.67 63.82,9.84 61.28,9.84 58.74,12.38 58.74,19.05 55.44,22.35 MDL3.16
N$29
  Bottom 0.305: MDL3.15 56.64,20.35 58.26,18.73 58.26,12.06 60.96,9.37 62.87,9.37 63.98,8.26 63.98,5.08 64.45,4.6 PROG2.2
N$30
  Bottom 0.813: J3.2 62.55,47.62 TRACK2.2
N$31
  Bottom 0.813: J3.1 65.09,47.62 TRACK2.1
N$32
  Top 0.305: U$9.17 65.09,12.22 65.72,12.86 66.52,12.86 67.63,11.75 67.63,9.84 69.53,7.94 R8.2
N$33
  Bottom 0.305: MDL3.12 55.18,14.35 57.94,11.59 57.94,5.24 56.83,4.13 PROG2.5
N$34
  Top 0.305: U$14.1 97.16,14.61 96.84,14.29 94.3,14.29 93.98,14.61 93.98,16.83 92.77,18.03 U$13.1
N$35
  Top 0.305: U$14.4 90.98,15.7 90.17,16.51 U$13.2
N$36
  Top 0.305: C22.1 79.31,9.46 Q4.3 79.38,11.21 79.38,11.75 83.82,16.19 U$13.7
N$37
  Top 0.305: C23.1 77.16,15.79 Q4.1 76.83,15.46 76.83,14.61 77.47,13.97 80.64,13.97 82.55,15.88 U$13.8
N$38
  Bottom 0.305: CAN-TERM3.2 97.28,8.13 R10.2
N$39
  Bottom 0.305: PROG3.1 92.08,6.67 88.9,9.84 86.36,9.84 83.82,12.38 83.82,19.05 80.52,22.35 MDL4.16
N$40
  Bottom 0.305: MDL4.15 81.73,20.35 83.34,18.73 83.34,12.06 86.04,9.37 87.95,9.37 89.06,8.26 89.06,5.08 89.53,4.6 PROG3.2
N$41
  Bottom 0.813: J4.2 87.63,47.62 TRACK3.2
N$42
  Bottom 0.813: J4.1 90.17,47.62 TRACK3.1
N$43
  Top 0.305: U$13.17 90.17,12.22 90.81,12.86 91.6,12.86 92.71,11.75 92.71,9.84 94.61,7.94 R11.2
N$44
  Bottom 0.305: MDL4.12 80.27,14.35 83.03,11.59 83.03,5.24 81.92,4.13 PROG3.5
SCK  (via drill 0.6)
  Top 0.305: v9.84,12.38 U$1.13
  Bottom 0.305: MDL1.5 11.81,14.35 v9.84,12.38
SCK1  (via drill 0.6)
  Top 0.305: v34.92,12.38 U$5.13
  Bottom 0.305: MDL2.5 36.89,14.35 v34.92,12.38
SCK2  (via drill 0.6)
  Top 0.305: v60.01,12.38 U$9.13
  Bottom 0.305: MDL3.5 61.98,14.35 v60.01,12.38
SCK3  (via drill 0.6)
  Top 0.305: v85.09,12.38 U$13.13
  Bottom 0.305: MDL4.5 87.06,14.35 v85.09,12.38
SI  (via drill 0.6)
  Top 0.305: v11.11,11.11 U$1.14
  Bottom 0.305: MDL1.7 17.43,10.35 16.51,11.27 11.27,11.27 v11.11,11.11
SI1  (via drill 0.6)
  Top 0.305: v36.2,11.11 U$5.14
  Bottom 0.305: MDL2.7 42.51,10.35 41.59,11.27 36.35,11.27 v36.2,11.11
SI2  (via drill 0.6)
  Top 0.305: v61.28,11.11 U$9.14
  Bottom 0.305: MDL3.7 67.6,10.35 66.67,11.27 61.44,11.27 v61.28,11.11
SI3  (via drill 0.6)
  Top 0.305: v86.36,11.11 U$13.14
  Bottom 0.305: MDL4.7 92.68,10.35 91.76,11.27 86.52,11.27 v86.36,11.11
SO  (via drill 0.6)
  Top 0.305: v12.38,12.38 U$1.15
  Bottom 0.305: MDL1.6 12.41,12.35 v12.38,12.38
SO1  (via drill 0.6)
  Top 0.305: v37.47,12.38 U$5.15
  Bottom 0.305: MDL2.6 37.5,12.35 v37.47,12.38
SO2  (via drill 0.6)
  Top 0.305: v62.55,12.38 U$9.15
  Bottom 0.305: MDL3.6 62.58,12.35 v62.55,12.38
SO3  (via drill 0.6)
  Top 0.305: v87.63,12.38 U$13.15
  Bottom 0.305: MDL4.6 87.66,12.35 v87.63,12.38

## Text on the board
Bottom: MäCAN Adap / Rev A v0.1 | MäCAN Adap / Rev A v0.1 | MäCAN Adap / Rev A v0.1 | MäCAN Adap / Rev A v0.1
tPlace: UDP-Bridge / Rev A v0.2 | UDP-Bridge / Rev A v0.2 | UDP-Bridge / Rev A v0.2 | UDP-Bridge / Rev A v0.2
_bPlace: MDL1 | MDL1 | MDL1 | MDL1
_tNames: J1 | J1 | J1 | J1 | b | r | b | r | b | r | b | r | C5 | C5 | C5 | C5 | IC2 | IC2 | IC2 | IC2 | C6 | C6 | C6 | C6 | C2 | C2 | C2 | C2 | Q1 | Q1 | Q1 | Q1 | C1 | C1 | C1 | C1 | R4 | C3 | R4 | C3 | R4 | C3 | R4 | C3 | R1 | R1 | R1 | R1 | 0 | GND | RX | TX | 0 | GND | RX | TX | 0 | GND | RX | TX | 0 | GND | RX | TX
_bNames: C7 | C7 | C7 | C7 | CAN-TERM | CAN-TERM | CAN-TERM | CAN-TERM | R2 | R2 | R2 | R2 | C4 | C4 | C4 | C4